# Allegro board WD7992A_SiderkeyFPC_V1_function_A.brd
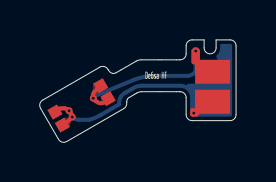
[diagram p0: board, top side]
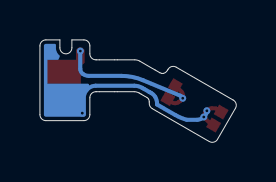
[diagram p1: board, bottom side, seen from below]

Outline 9.82 x 5.13 mm; copper layers: TOP, BOTTOM. Coordinates in mm from the lower left corner of the outline.
Outline path: 0.03,1.7 arc(0,1.93) 0.14,2.11 3,3.76 arc(3.23,3.79) 3.41,3.65 3.43,3.61 arc(3.45,3.57) 3.48,3.54 arc(3.55,3.48) 3.65,3.45 arc(3.69,3.44) 3.73,3.45 arc(3.77,3.46) 3.81,3.48 4.82,4.06 arc(4.94,4.11) 5.07,4.13 7.02,4.13 arc(7.23,4.22) 7.32,4.43 7.32,4.83 arc(7.41,5.04) 7.62,5.13 8.22,5.13 8.22,4.73 arc(8.52,4.43) 8.82,4.73 8.82,5.13 9.52,5.13 arc(9.73,5.04) 9.82,4.83 9.82,1.38 arc(9.73,1.17) 9.52,1.08 7.62,1.08 arc(7.41,1.17) 7.32,1.38 7.32,2.23 arc(7.23,2.44) 7.02,2.53 5.1,2.53 arc(4.97,2.51) 4.85,2.46 4.75,2.4 4.47,2.24 arc(4.42,2.2) 4.38,2.16 arc(4.36,2.1) 4.35,2.04 arc(4.35,2) 4.35,1.97 arc(4.31,1.8) 4.2,1.68 1.34,0.03 arc(1.11,0) 0.93,0.14 0.03,1.7

## Design rules (mm)
constraint set DEFAULT: min track width 0.075, pair gap 0.1

## Placement (name value [footprint] x y rotation side)
J3101  -  [TP1]  8.72 3.53 0 top
J3102  -  [TP1]  8.72 2.03 0 top
NOREF  -  []  -2157.76 -2155.46 0 top
SW3101  EVPBB4A9BT02  [SWITCH4_3X1D6X0D65]  2.08 1.84 30 top

## Library data of the parts
J3101 J3102 = TP1
SW3101 = EVPBB4A9BT02

## Footprints (pads in the part's own frame, mm; a bottom-side part is the same pattern mirrored in y, then rotated)
SWITCH4_3X1D6X0D65
  rect 0.55x0.55 smd: A1(-1.325,0.375) A2(-1.325,-0.375) B1(1.325,0.375) B2(1.325,-0.375)
TP1
  round 1 smd: 1(0,0)

## Nets
GND: J3102.1 SW3101.A1 SW3101.A2
FUN_KEY_N_CON: J3101.1 SW3101.B1 SW3101.B2

## Via types
v1: diameter 0.35, hole 0.15, TOP to BOTTOM, 5 vias

## Routing (per net, layer and track width the routed paths; a pad name or vN(x,y) marks a point on that pad's centre or on a via; arc(x,y) is an arc through that point)
GND: length 8.9
  TOP w0.2: SW3101.A1 0.82,1.58 arc(0.9,1.64) 0.99,1.68 arc(1.11,1.7) 1.22,1.7 arc(1.33,1.67) 1.42,1.61 v1(1.46,1.57) 1.51,1.53 arc(1.59,1.4) v1(1.62,1.26) 1.28,0.92 arc(1.21,0.87) SW3101.A2
  BOTTOM w0.2: v1(1.46,1.57) arc(1.49,1.43) 1.57,1.3 v1(1.62,1.26) arc(1.77,1.16) 1.95,1.12 2.47,1.12 arc(2.76,1.22) 3.04,1.36 3.96,1.89 3.96,1.95 arc(3.98,2.11) 4.05,2.26 arc(4.13,2.37) 4.24,2.45 4.33,2.51 arc(4.34,2.51) 4.34,2.51 4.7,2.72 arc(4.89,2.8) 5.1,2.83 7.02,2.83 arc(7.29,2.76) 7.5,2.59
  vias: v1(7.7,1.45)
FUN_KEY_N_CON: length 8.2
  TOP w0.2: SW3101.B2 3.27,2.04 arc(3.09,1.95) 2.9,2 2.79,2.06 arc(2.72,2.12) v1(2.67,2.2) arc(2.65,2.37) 2.74,2.53 3.02,2.81 SW3101.B1
  BOTTOM w0.2: v1(2.67,2.2) 2.68,2.22 arc(2.72,2.28) 2.79,2.33 4.67,3.11 arc(5.2,3.27) 5.74,3.32 7.37,3.32 arc(7.53,3.35) 7.68,3.42 arc(7.77,3.53) 7.8,3.67 7.8,4.56 v1(7.8,4.57)

## Copper pours and planes (outline as drawn; the poured copper is in the pictures)
GND on TOP (solid shape): 9.52,1.43 7.77,1.43 7.77,2.63 9.52,2.63
GND on BOTTOM (solid shape): 9.52,4.93 9.59,4.9 9.62,4.83 9.62,1.38 9.59,1.31 9.52,1.28 7.62,1.28 7.55,1.31 7.52,1.38 7.52,2.23 7.49,2.42 7.38,2.58 7.36,2.62 7.36,2.86 7.38,2.91 7.42,2.93 9.45,2.93 9.45,4.13 8.94,4.13 8.9,4.14 8.88,4.17 8.83,4.3 8.84,4.34 8.86,4.35 8.98,4.52 9.02,4.73 9.02,4.86 9.04,4.91 9.09,4.93
FUN_KEY_N_CON on TOP (solid shape): 9.52,2.93 7.77,2.93 7.77,4.13 9.52,4.13

Small or netless copper shapes (teardrops, artwork), in the pictures only: 6 on TOP, 1 on BOTTOM

## Text on the board
Ref Des/Silkscreen Top: De6sa HF
User.35: FIGURE | FINISHED_SIZE | 0.15 | DRILL CHART: TOP to BOTTOM | ALL UNITS ARE IN MILLIMETERS | PLATED | QTY | 5 | TOTAL HOLES:
